# EAGLE board orig-xmastree (EAGLE 9.6.2)
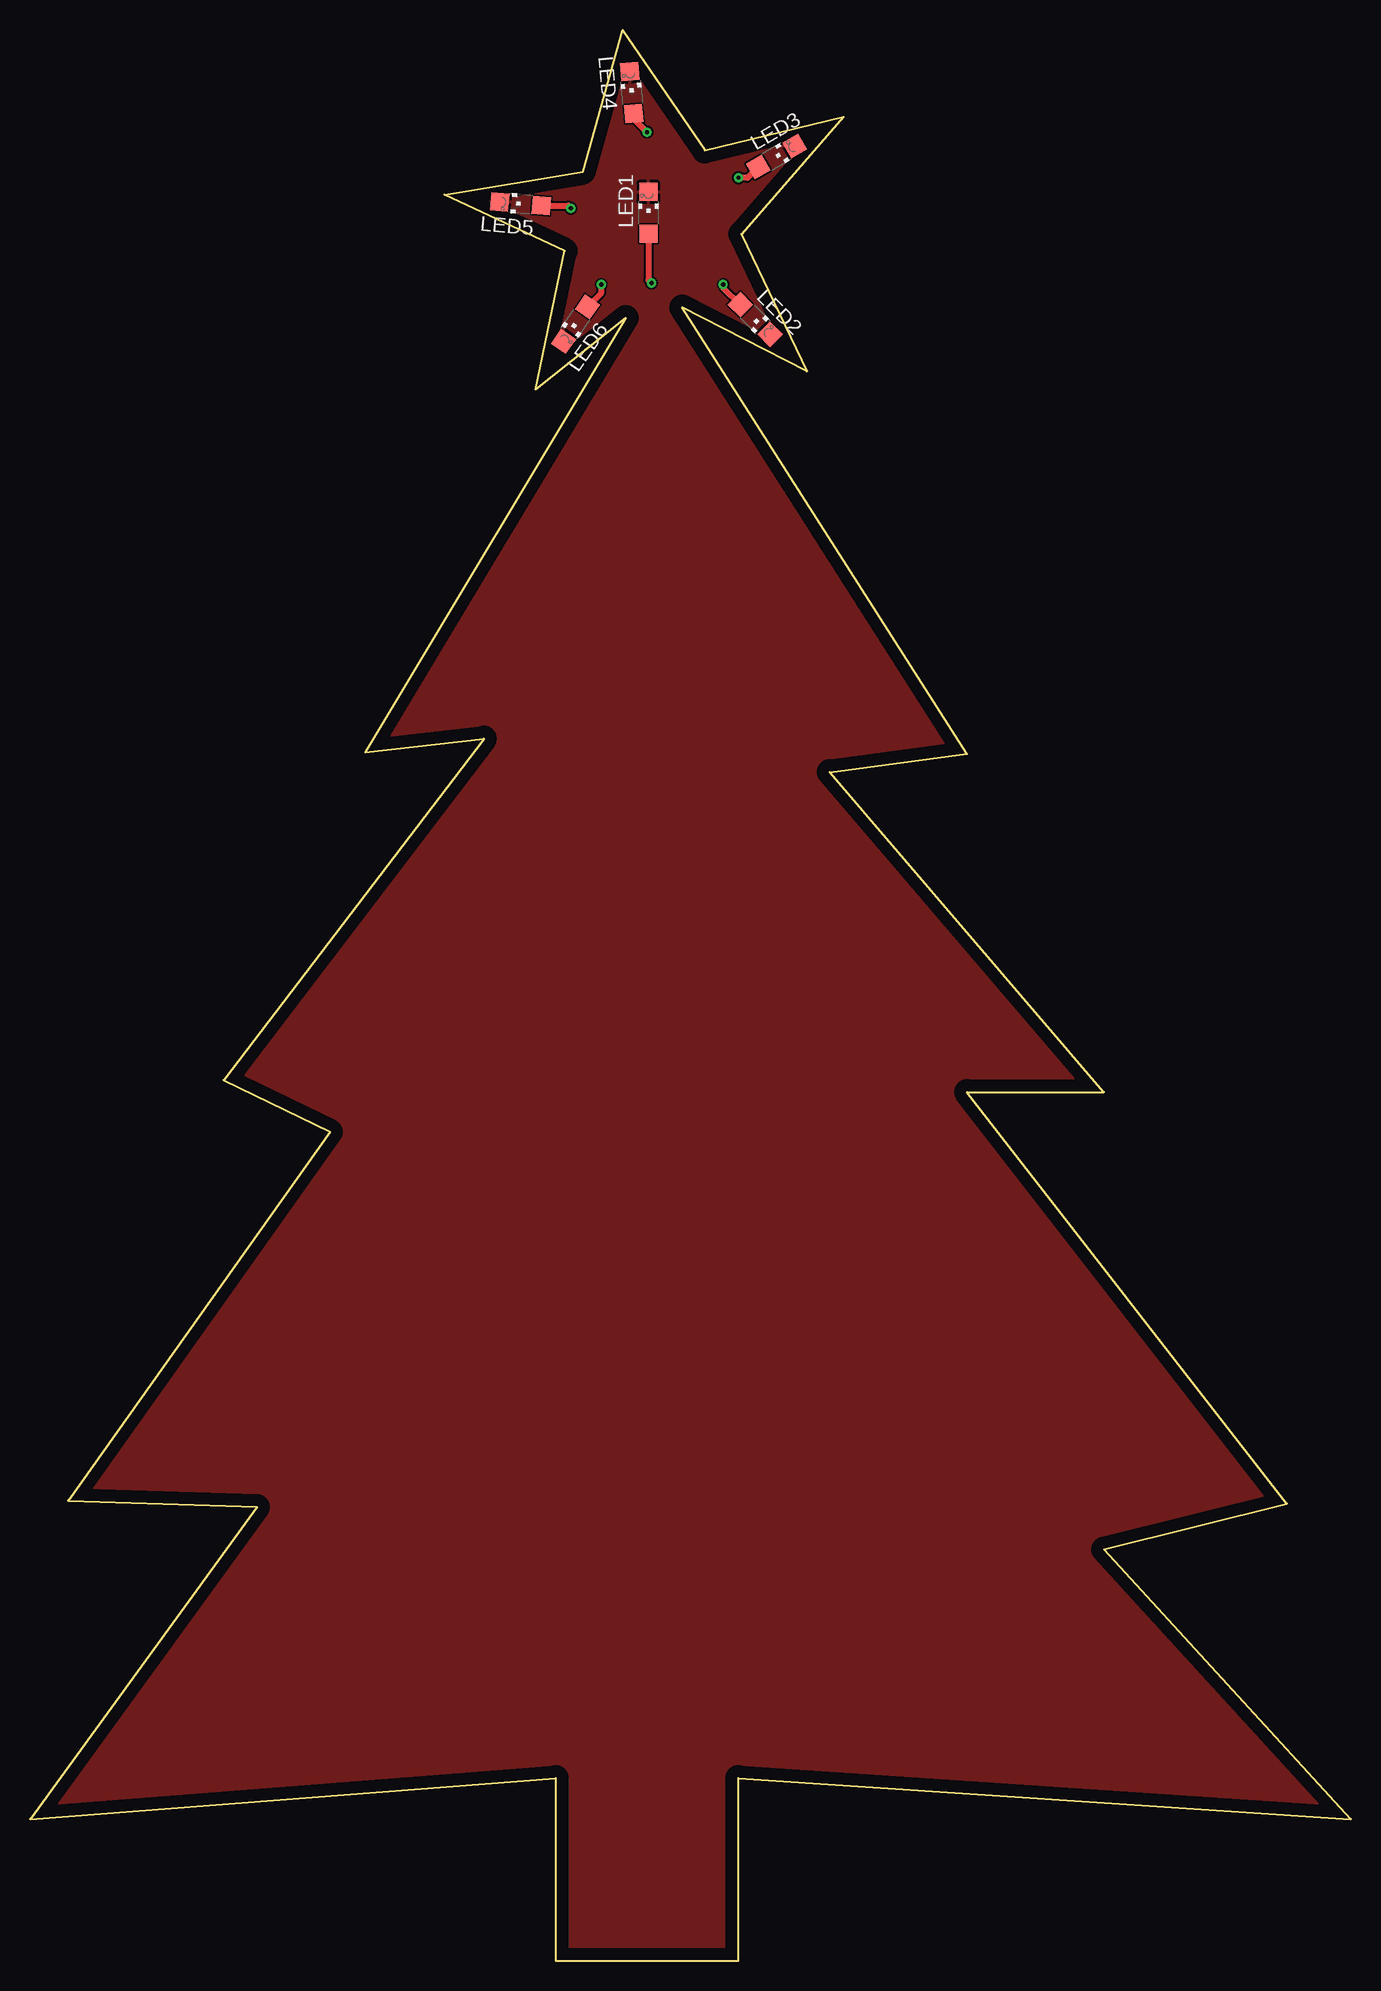
[diagram p0: board, top side]
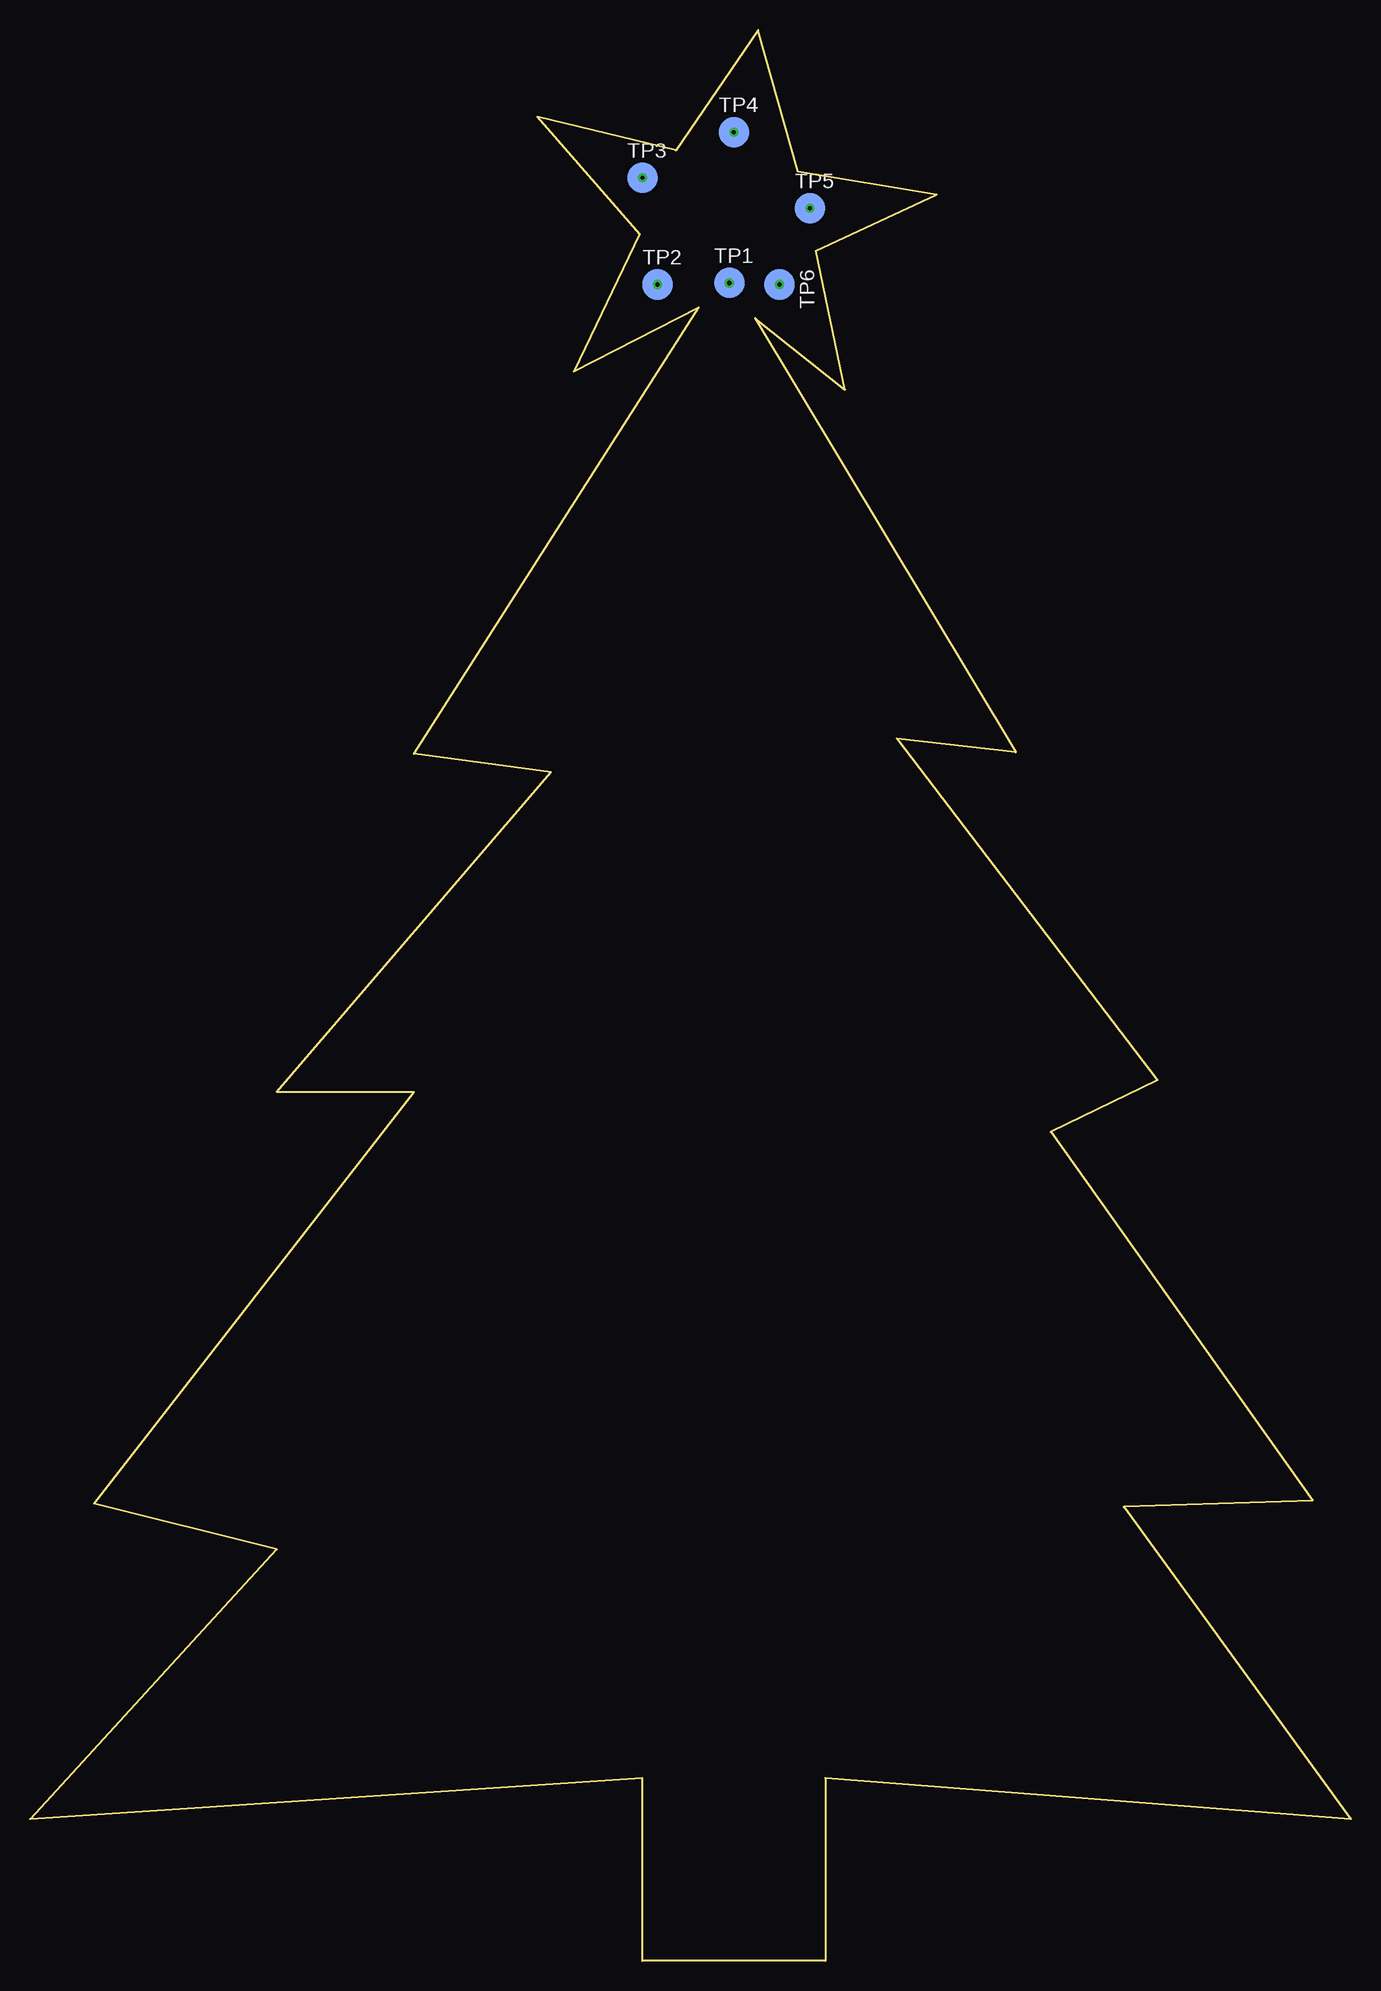
[diagram p1: board, bottom side, seen from below]

Size 110.11 x 160.91 mm. Coordinates in mm from the lower left corner, seen from the top.
Outline: 43.82,0 59.05,0 59.05,15.24 110.11,11.81 89.53,34.29 104.78,38.1 78.11,72.39 89.53,72.39 66.67,99.06 78.11,100.58 54.36,137.79 64.77,132.46 59.31,143.89 67.82,153.67 56.26,150.88 49.4,160.91 46.1,149.1 34.54,147.19 44.58,142.49 42.16,130.94 49.66,136.91 27.94,100.71 37.85,101.85 16.13,73.41 25.02,69.09 3.18,38.35 18.92,37.85 0,11.81 43.82,15.24 43.82,0
Copper layers (1*16): Top 0.035mm / dielectric 1.5mm / Bottom 0.035mm
Design rules "default": minimum track width 6mil, minimum drill 0.35mm, track to track 6mil, track to pad 6mil, pad to pad 6mil, via to via 6mil, smd to smd 6mil, copper to edge 40mil, drill to drill 6mil, minimum pad ring 10mil, minimum via ring 8mil, stop-mask expansion 4mil, vias tented up to drill 0mil, thermal gap 10mil

## Footprints (pad centres in the part's own frame; a part is rotated, then mirrored left to right if it is on the bottom)
CHIPLED_1206 = smd 1.5 x 1.5: A 0,-1.75; C 0,1.75
B2,54 = smd 2.54 x 2.54: TP 0,0

## Placement (x,y rotation side)
LED1  [CHIPLED_1206]  51.56,145.67 0 top
LED2  [CHIPLED_1206]  60.45,136.78 225 top
LED3  [CHIPLED_1206]  62.23,150.37 300 top
LED4  [CHIPLED_1206]  50.16,155.7 5 top
LED5  [CHIPLED_1206]  40.89,146.43 85 top
LED6  [CHIPLED_1206]  45.47,136.4 145 top
TP1  TPB2,54  [B2,54]  51.82,139.83 0 bottom
TP2  TPB2,54  [B2,54]  57.79,139.7 0 bottom
TP3  TPB2,54  [B2,54]  59.05,148.59 0 bottom
TP4  TPB2,54  [B2,54]  51.44,152.4 0 bottom
TP5  TPB2,54  [B2,54]  45.09,146.05 0 bottom
TP6  TPB2,54  [B2,54]  47.62,139.7 270 bottom

## Library data of the parts
LED1-LED6 = led
TP1-TP6 = testpad

## Nets
GND: LED1.C LED2.C LED3.C LED4.C LED5.C LED6.C
N$1: LED1.A TP1.TP
N$2: LED2.A TP2.TP
N$3: LED3.A TP3.TP
N$4: LED4.A TP4.TP
N$5: LED5.A TP5.TP
N$6: LED6.A TP6.TP

## Tracks (layer width: path | path; a pad name or v marks a point on that pad's centre or on a via)
GND
  pour Top: -0.63,162.56 112.4,162.56 112.4,-1.27 -0.63,-1.27
N$1  (via drill 0.35)
  Top 0.508: LED1.A 51.56,140.08 TP1.TP
  other vias: 51.82,139.83
N$2  (via drill 0.35)
  Top 0.508: LED2.A 57.79,139.45 TP2.TP
  other vias: 57.79,139.7
N$3  (via drill 0.35)
  Top 0.508: LED3.A 59.81,148.59 TP3.TP
  other vias: 59.05,148.59
N$4  (via drill 0.35)
  Top 0.508: LED4.A 50.32,153.52 TP4.TP
  other vias: 51.44,152.4
N$5  (via drill 0.35)
  Top 0.508: LED5.A 44.86,146.28 TP5.TP
  other vias: 45.09,146.05
N$6  (via drill 0.35)
  Top 0.508: LED6.A 47.62,138.99 TP6.TP
  other vias: 47.62,139.7